# Altium PCB PCB1.PcbDoc
Units mil, origin at the board's own origin, x right, y up, seen from the top; angles counter-clockwise.
Board outline 6000 x 4000 mil, 2 copper layers (Top Layer, Bottom Layer); 4 components, 7 nets, 68 pads, 2 vias.
Unrouted connection lines stored in the file: 13.
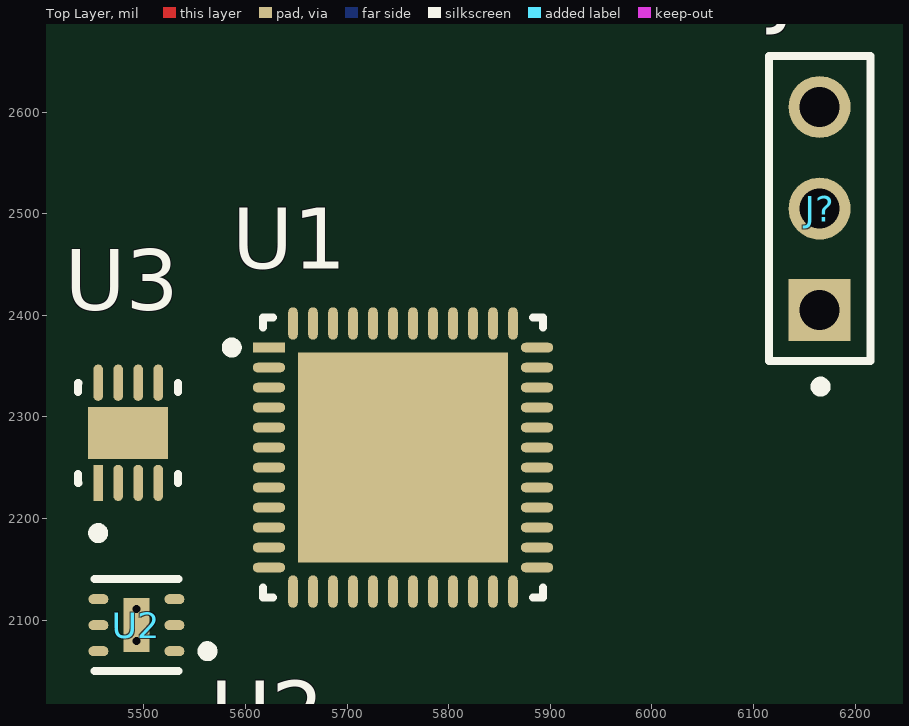
[diagram p0: Top Layer view]
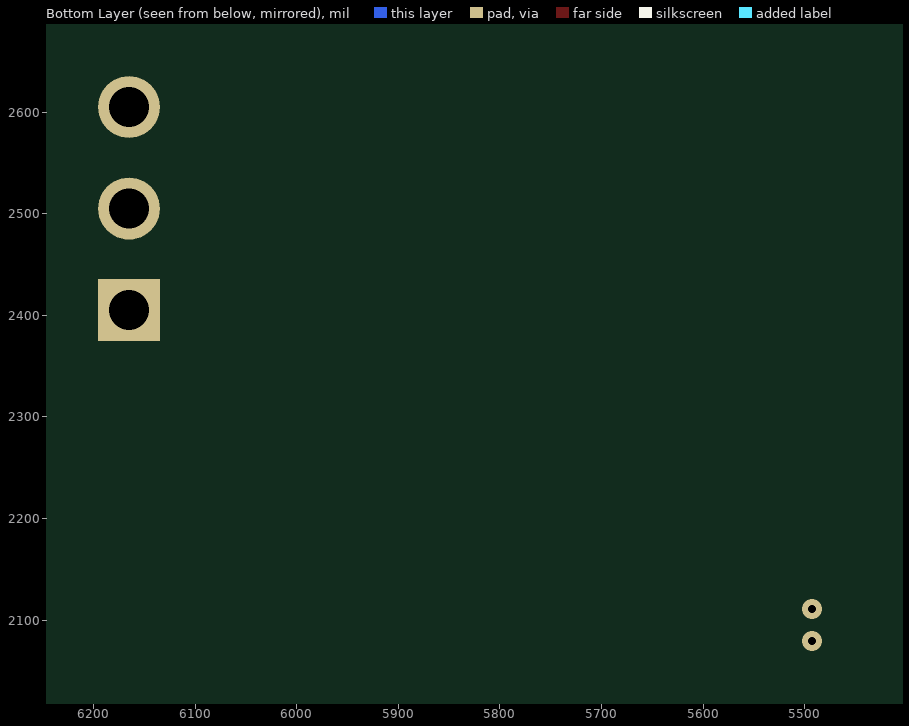
[diagram p1: Bottom Layer view, seen from below]

## Layer stack, top to bottom
Top Solder: solder mask 0.4, Solder Resist, Dk 3.5
Top Layer: signal copper 1.4
Dielectric 1: dielectric 12.6, FR-4, Dk 4.8
Bottom Layer: signal copper 1.4
Bottom Solder: solder mask 0.4, Solder Resist, Dk 3.5

## Board outline
1000,1000 7000,1000 7000,5000 1000,5000

## Design rules (kind name [scope] priority, off if disabled: settings)
Clearance [All] p1: gap=10 ignorepadtopadclearanceinfootprint=FALSE
PolygonConnect [All] p1: connectstyle=Relief reliefconductorwidth=10 reliefentries=4 polygonreliefangle="90 Angle" airgapwidth=10
RoutingVias [All] p1: holewidth=28 width=50 viastyle="Through Hole" minholewidth=28 minwidth=50 maxholewidth=28 maxwidth=50
SolderMaskExpansion [All] p1: expansion=4 istentingtop=FALSE
SupplyNets "Schematic Supply Nets_2" [InNet('3.3V')] p1: voltage=0.000
SupplyNets "Schematic Supply Nets_1" [InNet('GND')] p2: voltage=0.000
SupplyNets "Schematic Supply Nets" [InNet('VCC')] p3: voltage=0.000
Width [All] p1: maxlimit=10 minlimit=10 preferedwidth=10
30 further rules are at their usual default settings.

## Components (designator, comment, footprint, x,y, rotation, side; value= is the part's Value field where it differs from the comment)
J? "90120-0763" FP-90120-0763-MFG 6165,2505 r90 top
U1 "CC1310F128RGZR" FP-RGZ0048A-IPC_C 5755,2260 r0 top
U2 "OPT3001DNPR" FP-DNP0006A-MFG 5492.6,2095 r180 top
U3 "HDC3022DEJR" FP-DEJ0008A-C01-IPC_A 5484.53,2284.33 r90 top

## Footprints (in the part's own frame and the unit in brackets; to place one, negate y for a bottom-side part, rotate by r counter-clockwise, add the part's x,y. Pads: shape width x height; smd on the part's side, far side on the other; paste and mask are expansions set on the pad)
FP-90120-0763-MFG [mm]
  rect 1.55x1.55 hole 1 paste-2539.97 mask+0: 1(-2.54,0)
  round 1.55 hole 1 paste-2539.97 mask+0: 2(0,0) 3(2.54,0)
  silkscreen extent -4.57,-1.27 3.81,1.27, body extent -3.91,-1.37 3.91,1.37, height 0.25
FP-DEJ0008A-C01-IPC_A [mm]
  rect 0.906x0.242 smd paste+0 mask+0: 1(-1.253,0.75)
  rrect100% 0.906x0.242 smd paste+0 mask+0: 2(-1.253,0.25) 3(-1.253,-0.25) 4(-1.253,-0.75) 5(1.253,-0.75) 6(1.253,-0.25) 7(1.253,0.25) 8(1.253,0.75)
  rect 1.3x2 smd paste-1000 mask+0: 9(0,0)
  silkscreen extent -2.63,-1.25 1.25,1.25, body extent -2.21,-1.75 2.21,1.75, height 0.25
FP-DNP0006A-MFG [mm]
  rrect100% 0.5x0.25 smd paste+0 mask+0: 1(-0.95,0.65) 2(-0.95,0) 3(-0.95,-0.65) 4(0.95,-0.65) 5(0.95,0) 6(0.95,0.65)
  rect 0.65x1.35 smd paste-1000 mask+0: 7(0,0)
  silkscreen extent -1.9,-1.15 1.05,1.15, body extent -1.3,-1.15 1.3,1.15, height 0.25
FP-RGZ0048A-IPC_C [mm]
  rect 0.81x0.239 smd paste+0 mask+0: 1(-3.351,2.75)
  rrect100% 0.81x0.239 smd paste+0 mask+0: 2(-3.351,2.25) 3(-3.351,1.75) 4(-3.351,1.25) 5(-3.351,0.75) 6(-3.351,0.25) 7(-3.351,-0.25) 8(-3.351,-0.75) 9(-3.351,-1.25) 10(-3.351,-1.75) 11(-3.351,-2.25) 12(-3.351,-2.75) 25(3.351,-2.75) 26(3.351,-2.25) 27(3.351,-1.75) 28(3.351,-1.25) 29(3.351,-0.75) 30(3.351,-0.25) 31(3.351,0.25) 32(3.351,0.75) 33(3.351,1.25) 34(3.351,1.75) 35(3.351,2.25) 36(3.351,2.75)
  rrect100% 0.239x0.81 smd paste+0 mask+0: 13(-2.75,-3.351) 14(-2.25,-3.351) 15(-1.75,-3.351) 16(-1.25,-3.351) 17(-0.75,-3.351) 18(-0.25,-3.351) 19(0.25,-3.351) 20(0.75,-3.351) 21(1.25,-3.351) 22(1.75,-3.351) 23(2.25,-3.351) 24(2.75,-3.351) 37(2.75,3.351) 38(2.25,3.351) 39(1.75,3.351) 40(1.25,3.351) 41(0.75,3.351) 42(0.25,3.351) 43(-0.25,3.351) 44(-0.75,3.351) 45(-1.25,3.351) 46(-1.75,3.351) 47(-2.25,3.351) 48(-2.75,3.351)
  rect 5.25x5.25 smd paste-1000 mask+0: 49(0,0)
  silkscreen extent -4.41,-3.5 3.5,3.5, body extent -3.86,-3.86 3.86,3.86, height 0.25

## Part data
J?: library part CMP-04776-000084-1, "CONN HEADER VERT 3POS 2.54MM", Current Rating=3A, Manufacturer=Molex, Temperature="-55°C to +125°C", Temperature Range High=+125°C, Temperature Range Low=-55°C, Voltage Rating=350V, Automotive=No, Category=Conn, ComponentLink2Description=Datasheet, ComponentLink2URL=https://www.molex.com/webdocs/datasheets/pdf/en-us/0901200763_PCB_HEADERS.pdf, Conn Gender=Male, Conn Orientation=Vertical, Contact Material=Gold,Nickel, Device Class L1=Connectors, Device Class L2="Headers and Wire Housings", Device Class L3=unset, Digikey Description="CONN HEADER VERT 3POS 2.54MM", Footprint Url=https://www.molex.com/pdm_docs/sd/901200763_sd.pdf, Height=5.8mm, Lead Free=Yes, Manufacturer Part Number=90120-0763, Mouser Description="Board-To-Board Connector, C-Grid III 90120 Series, Through Hole, Header, 3, 2.54 mm", Number Of Contacts=3, Number Of Rows=1, Octopart=https://octopart.com/90120-0763-molex-655433, Package=90120-0763, Pitch=2.54mm, RoHS=TRUE
U1: library part CMP-04869-000048-1, "IC RF TXRX+MCU ISM<1GHZ 48VFQFN", Max Frequency=1GHz, Max Operating Temperature=85°C, Max Supply Voltage=3.8V, Min Operating Temperature=-40°C, Min Supply Voltage=1.8V, Contact Plating=Gold, Density=131072B, Lead Free="Lead Free", Memory Size=128KB, Mount="Surface Mount", Number of Pins=48, Ram Size=20KB, RoHS Compliant=Yes
U2: library part CMP-04942-000002-1, "SENSOR OPT 550NM AMBIENT 6USON", Manufacturer="Texas Instruments", Max Junction Temp=+150°C, Max Supply Voltage=3.6V, Min Supply Voltage=1.6V, Operating Supply Current=0.3-1.8uA, Package=DNP0006A, Temperature="-40°C to +85°C", Temperature Range High=+85°C, Temperature Range Low=-40°C, Automotive=No, Category=IC, ComponentLink2Description=Datasheet, ComponentLink2URL=http://www.ti.com/lit/ds/symlink/opt3001.pdf, Device Class L1=Sensors, Device Class L2="Optical Sensors", Device Class L3=unset, Digikey Description="SENSOR OPT 550NM AMBIENT 6USON", Height=0.65mm, Ipc Land Pattern Name=DFN200X200X60-6, Lead Free=Yes, Manufacturer Part Number=OPT3001DNPR, Octopart=https://octopart.com/opt3001dnpr-texas+instruments-47324050, RoHS=TRUE, Sensor Output=I2C,SMBus, Standoff Height=0mm
U3: library part CMP-00370-133473010-1, "HDC3022DEJR 0.5% RH digital humidity sensor with permanent IP67 filter 8-WSON -40 to 125", Manufacturer Lifecycle Status=ACTIVE, Length=2.5mm, Lifecycle Status=Production, NexarPartId=133473010, Number of Pins=8, Thickness=800µm, Width=2.5mm

## Via types
v1: diameter 19.68, hole 7.87, Top Layer to Bottom Layer, 2 vias

## Nets (pads, with @x,y where several pads share a name; then routed paths per layer and width w, separated by ;. In a path a pad name is that pad's centre, name@x,y a point inside that pad or via, vN(x,y) a via of type N, cw(c..) or ccw(c..) an arc to the next point about the centre after c; other vN are vias at no path point)
3.3V: U2.1 U2.2 U3.5
GND: U2.3 U2.7 U3.2 U3.7 U3.8 U3.9
  other v1: 5492.6,2079.25 5492.6,2110.75
HDC_ALERT: U1.37 U3.3
I2C_SCL: U1.9 U2.4 U3.4
I2C_SDA: U1.10 U2.6 U3.1
NRESET: U1.35 U3.6
VCC: 
pads on no net: J?.1 J?.2 J?.3 U1.1 U1.2 U1.3 U1.4 U1.5 U1.6 U1.7 U1.8 U1.11 U1.12 U1.13 U1.14 U1.15 U1.16 U1.17 U1.18 U1.19 U1.20 U1.21 U1.22 U1.23 U1.24 U1.25 U1.26 U1.27 U1.28 U1.29 U1.30 U1.31 U1.32 U1.33 U1.34 U1.36 U1.38 U1.39 U1.40 U1.41 U1.42 U1.43 U1.44 U1.45 U1.46 U1.47 U1.48 U1.49 U2.5